# Altium PCB USB PROGRAMMER.PCBDOC
Units mil, origin at the board's own origin, x right, y up, seen from the top; angles counter-clockwise.
Board outline 975 x 2125 mil, 2 copper layers (Top Layer, Bottom Layer); 38 components, 37 nets, 124 pads, 0 vias.
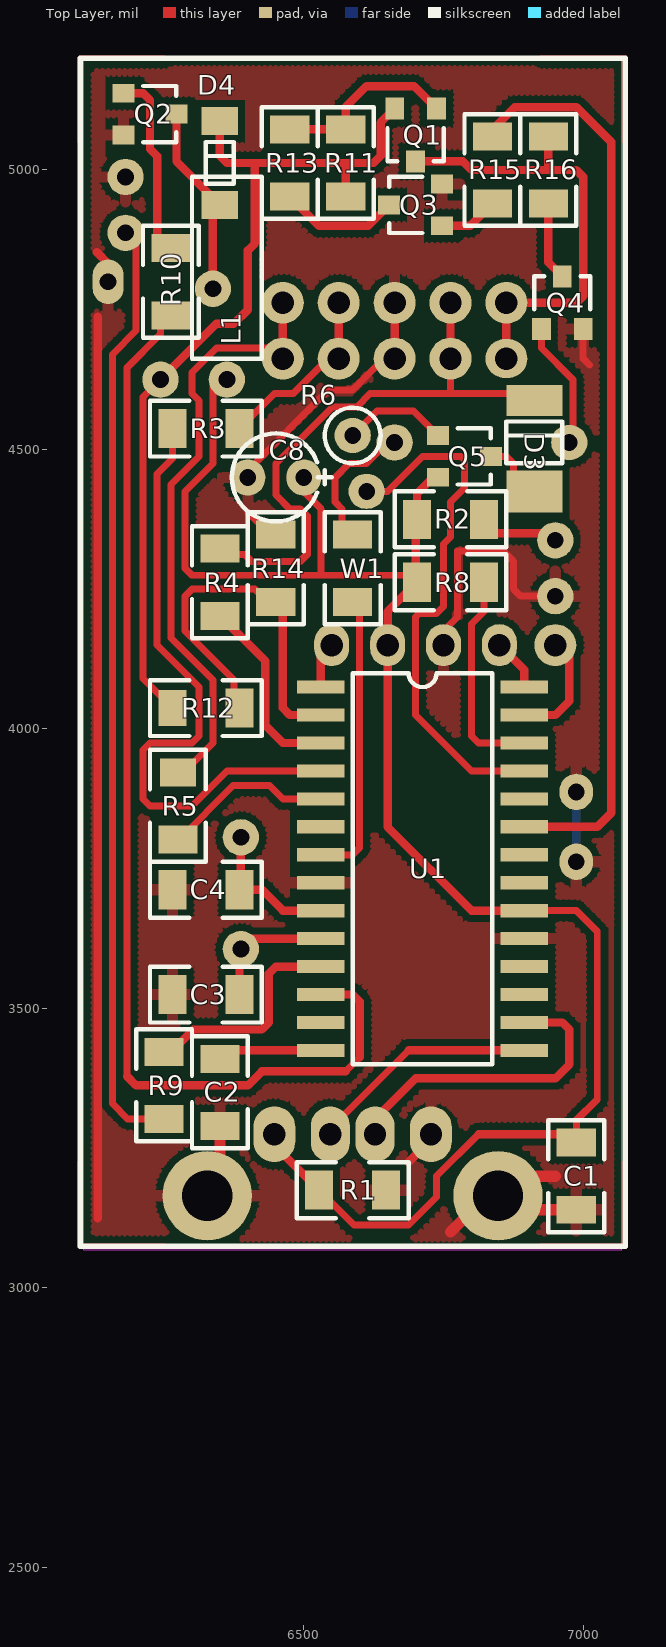
[diagram p0: Top Layer view]
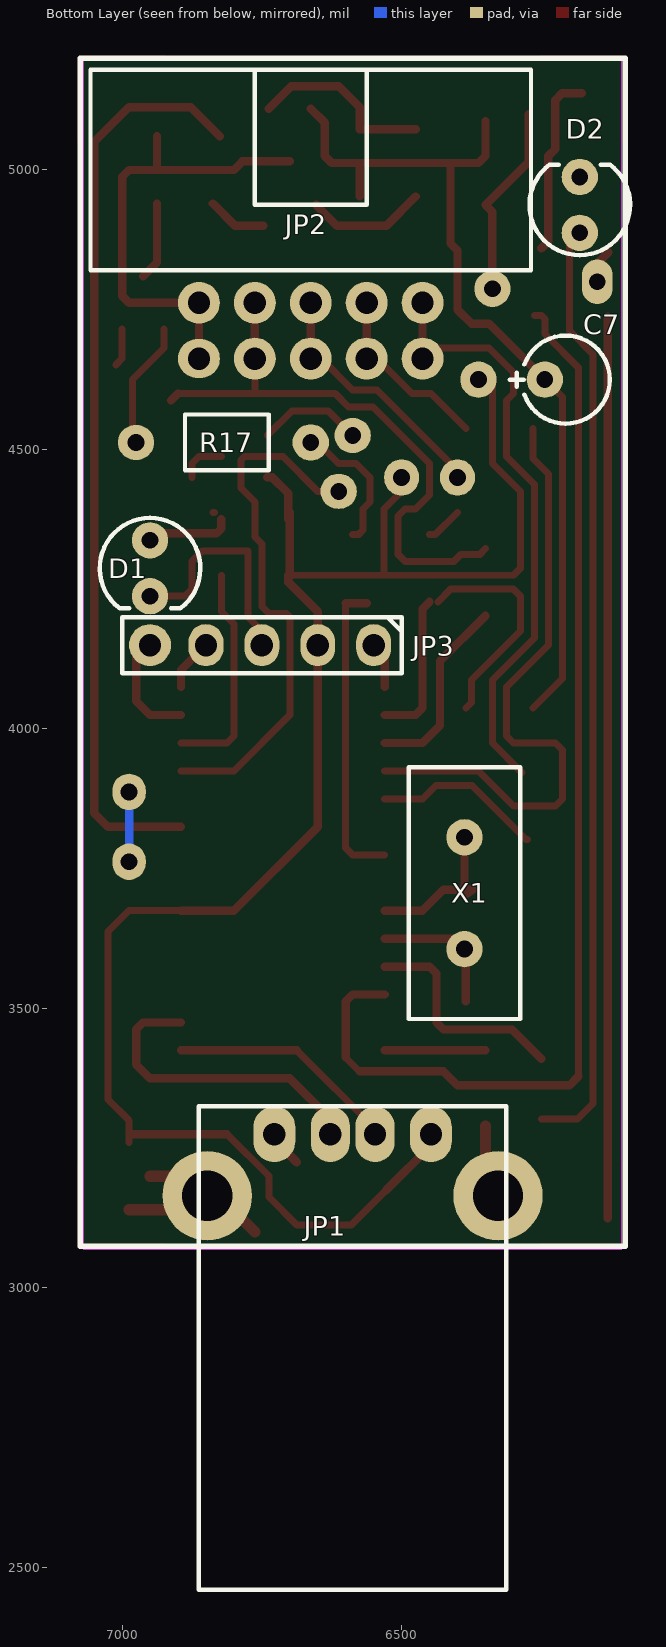
[diagram p1: Bottom Layer view, seen from below]

## Layer stack, top to bottom
Top Layer: signal copper 1.4
Dielectric: dielectric 12.6, FR-4, Dk 4.8
Bottom Layer: signal copper 1.4

## Board outline
6100,3075 7075,3075 7075,5200 6100,5200

## Design rules (kind name [scope] priority, off if disabled: settings)
Clearance [All] p1: gap=12.5
FabricationTestPointUsage TestPointUsage [All] p1: valid=0 allowmultiple=FALSE
FabricationTestpoint Testpoint [All] p1: side=3 testpointundercomponent=TRUE minsize=40 maxsize=100 preferedsize=60 minholesize=0 maxholesize=40 preferedholesize=32 testpointgrid=1 allowsidetop=TRUE allowsidebottom=TRUE usegrid=TRUE gridtolerance=0.01
PlaneConnect [All] p1: planeconnectstyle=Relief reliefexpansion=20 reliefentries=4 reliefconductorwidth=20 reliefairgap=10
PolygonConnect [All] p1: connectstyle=Relief reliefconductorwidth=20 reliefentries=4 polygonreliefangle="90 Angle"
RoutingVias [All] p1: holewidth=28 width=50 viastyle="Through Hole" minholewidth=28 minwidth=50 maxholewidth=28 maxwidth=50
SilkscreenOverComponentPads [All] p1: minsilkscreentomaskgap=10
SolderMaskExpansion [All] p1: expansion=4
Width [All] p1: maxlimit=20 minlimit=10 preferedwidth=20 bottomlayer_prefwidth=15 minimp=50.000000 maximp=50.000000 favimp=50.000000
24 further rules are at their usual default settings.

## Components (designator, comment, footprint, x,y, rotation, side; value= is the part's Value field where it differs from the comment)
C1 "Cap" 1206NP#1 6987.5,3200 r90 top
C2 "Cap" 1206NP#1 6350,3350 r90 top
C3 "Cap" 1206NP#1 6325,3525 r0 top
C4 "Cap" 1206NP#1 6325,3712.5 r180 top
C7 "Cap Pol" cap4mm#1 6206.25,4625 r180 bottom
C8 "Cap Pol" cap4mm#2 6450,4450 r180 top
D1 "LED" LED3MM 6950,4287.5 r270 bottom
D2 "LED" LED3MM 6181.25,4937.5 r90 bottom
D3 "SS34" D64 6912.5,4512.5 r270 top
D4 "1N4148" DSMD1MM 6350,5012.5 r270 top
JP1 "USB MALE" USB_A_MALE 6587.5,3275 r180 bottom
JP2 "Header5x1" IDC5x2_90 6662.5,4712.5 r180 bottom
JP3 "Header5x1" HDR5x1 6550,4150 r0 bottom
L1 "" RES400TH 6362.5,4825 r90 top
Q1 "BC857" SOT23 6700,5062.5 r180 top
Q2 "BC848" SOT23 6225,5100 r270 top
Q3 "BC848" SOT23 6700,4937.5 r90 top
Q4 "BC848" SOT23 6962.5,4762.5 r0 top
Q5 "BC857" SOT23 6787.5,4487.5 r270 top
R1 "Res" 1206NP#1 6587.5,3175 r0 top
R2 "Res" 1206NP#1 6762.5,4375 r180 top
R3 "Res" 1206NP#1 6325,4537.5 r0 top
R4 "Res" 1206NP#1 6350,4262.5 r90 top
R5 "Res" 1206NP#2 6275,3862.5 r90 top
R6 "Res" res250th_vertical 6587.5,4525 r270 top
R8 "Res" 1206NP#1 6762.5,4262.5 r180 top
R9 "Res" 1206NP#1 6250,3362.5 r90 top
R10 "Res" 1206NP#1 6262.5,4800 r270 top
R11 "Res" 1206NP#1 6575,5012.5 r270 top
R12 "Res" 1206NP#2 6325,4037.5 r180 top
R13 "Res" 1206NP#1 6475,5012.5 r90 top
R14 "Res" 1206NP#1 6450,4287.5 r270 top
R15 "Res" 1206NP#1 6837.5,5000 r90 top
R16 "Res" 1206NP#1 6937.5,5000 r90 top
R17 "Res" res250th 6812.5,4512.5 r180 bottom
U1 "" soic28 6712.5,3850 r270 top
W1 "CABLE" 1206NP#1 6587.5,4287.5 r90 top
X1 "XTAL" XTAL1 6387.5,3706.25 r90 bottom

## Footprints (in the part's own frame and the unit in brackets; to place one, negate y for a bottom-side part, rotate by r counter-clockwise, add the part's x,y. Pads: shape width x height; smd on the part's side, far side on the other; paste and mask are expansions set on the pad)
1206NP#1 [mil]
  rect 50x70 smd: 1(-60,0) 2(60,0)
  silkscreen extent -100,-50 100,50
1206NP#2 [mil]
  rect 50x70 smd: 1(-60,0)
  rect 50x65 smd: 2(60,0)
  silkscreen extent -100,-50 100,50
cap4mm#1 [mil] "CAPACITOR ELECTROLÍTICO"
  round 65 hole 30: 1(-37.5,0)
  oval 55x80 hole 30: 2(56.25,175)
  silkscreen extent -100,-79 79,79
cap4mm#2 [mil] "CAPACITOR ELECTROLÍTICO"
  oval 62.5x65 hole 30: 1(-50,0) 2(50,0)
  silkscreen extent -100,-79 79,79
D64 [mil]
  rect 75x100 smd: 1(87.5,0)
  rect 55x100 smd: 2(-75,0)
  silkscreen extent -38,-50 38,50
DSMD1MM [mil] "DIODO SMD"
  rect 50x65 smd: 1(75,0) 2(-75,0)
  silkscreen extent -38,-25 38,25
HDR5x1 [mil] "HEADER 5x1"
  oval 62.5x75 hole 40: 1(0,0) 2(100,0) 3(200,0) 4(300,0)
  round 75 hole 40: 5(400,0)
  silkscreen extent -50,-50 450,50
IDC5x2_90 [mil]
  oval 75x70 hole 40: 1(-200,-50)
  round 75 hole 40: 2(-200,50) 3(-100,-50) 4(-100,50) 5(0,-50) 6(0,50) 7(100,-50) 8(100,50) 9(200,-50) 10(200,50)
  silkscreen extent -394,108 394,467
LED3MM [mil] "LED 3MM"
  round 65 hole 30: 1(-50,0) 2(50,0)
  silkscreen extent -90,-90 72,90
res250th [mil] "RESISTENCIA THROUGH-HOLE"
  oval 65x62.5 hole 30: 1(-162.5,0)
  round 65 hole 30: 2(150,0)
  silkscreen extent -75,-50 75,50
res250th_vertical [mil]
  oval 62.5x65 hole 30: 1(0,0) 2(100,25)
  silkscreen extent -50,-50 50,50
RES400TH [mil]
  round 65 hole 30: 1(-200,0) 2(-37.5,25)
  silkscreen extent -162,-63 162,63
soic28 [mm]
  rect 0.6x2.15 smd: 1(-5.715,-4.625) 2(-4.445,-4.625) 3(-3.175,-4.625) 4(-1.905,-4.625) 5(-0.635,-4.625) 6(0.635,-4.625) 7(1.905,-4.625) 8(3.175,-4.625) 9(4.445,-4.625) 10(5.715,-4.625) 11(6.985,-4.625) 12(8.255,-4.625) 13(9.525,-4.625) 14(10.795,-4.625) 15(10.795,4.625) 16(9.525,4.625) 17(8.255,4.625) 18(6.985,4.625) 19(5.715,4.625) 20(4.445,4.625) 21(3.175,4.625) 22(1.905,4.625) 23(0.635,4.625) 24(-0.635,4.625) 25(-1.905,4.625) 26(-3.175,4.625) 27(-4.445,4.625) 28(-5.715,4.625)
  silkscreen extent -6.35,-3.18 11.43,3.18
SOT23 [mm] "SOT23"
  rect 0.85x1 smd: 1(-0.95,-1.2) 2(0.95,-1.2) 3(0,1.2)
  silkscreen extent -1.27,-0.3 1.28,1.2
USB_A_MALE [mil]
  oval 75x100 hole 40: 1(140,0) 4(-140,0)
  oval 70x100 hole 40: 2(40,0) 3(-40,0)
  round 160 hole 90: 5(260,-110) 6(-260,-110)
  silkscreen extent -275,-815 275,50
XTAL1 [mil] "CRISTAL DE CUARZO"
  round 65 hole 30: 1(-100,0) 2(100,0)
  silkscreen extent -225,-100 225,100

## Part data
C1 C2 C3 C4: "Capacitor"
C7 C8: "Capacitor Polarizado"
D1 D2: "Led"
D3: library part 1N4148, "High Conductance Fast Diode"
D4: "High Conductance Fast Diode"
JP1: library part USB, "USB Connector"
JP2: "Header 5x1"
JP3: library part Header6x1, "Header 6x1"
L1: library part Inductor, "Inductor"
Q1 Q5: library part BC856A, "100mA 65V PNP Bipolar Transistor"
Q2 Q3 Q4: library part BC846A, "100mA 65V NPN Bipolar Transistor"
R1 R2 R3 R4 R5 R6 R8 R9 R10 R11 R12 R13 R14 R15 R16 R17: "Resistor"
U1: library part PIC18F2550, "Enhanced FLASH Microcontroller"
W1: "Cable"
X1: "Crystal Oscillator"

## Free pads (board coordinates)
  oval 60x65 hole 30: 2(6987.5,3887.5) 3(6987.5,3762.5)

## Nets (pads, with @x,y where several pads share a name; then routed paths per layer and width w, separated by ;. In a path a pad name is that pad's centre, name@x,y a point inside that pad or via, vN(x,y) a via of type N, cw(c..) or ccw(c..) an arc to the next point about the centre after c; other vN are vias at no path point)
BSY: R9.2 U1.11 | length 400
  Top Layer w15: R9.2@6250,3410 6302.5,3462.5 6425,3462.5 6437.5,3475 6437.5,3562.5 6450,3575 U1.11
D+: JP1.3 U1.16 | length 563.5
  Top Layer w15: JP1.3 6627.5,3302.5 6700,3375 6950,3375 6975,3400 6975,3462.5 6962.5,3475 U1.16
D-: JP1.2 U1.15 | length 415.1
  Top Layer w12.5: JP1.2@6547.5,3285 6687.5,3425
  Top Layer w15: JP1.2 JP1.2@6547.5,3285 ; 6687.5,3425 U1.15
GND: C1.1 C2.1 C3.1 C4.2 C7.2 C8.2 D1.2 D2.2 JP1.4 JP1.5 JP1.6 JP2.5 JP2.6 JP3.3 pad.2 pad.3 Q2.2 Q3.2 Q4.2 R1.2 R14.1 U1.8 U1.19 | length 3233.4
  Top Layer w12.5: 6400,4387.5 6440,4347.5 R14.1 ; C8.2 6400,4462.5 6543.75,4606.25 6587.5,4606.25 6643.75,4662.5 JP2.5 ; JP3.3 6750,4175 6775,4200 6775,4318.75 6856.25,4318.75 6875,4300 6875,4250 6887.5,4237.5 D1.2 ; Q4.2 6999.9,4662.6 7011.25,4651.25
  Top Layer w15: 6130,4852.81 6150,4832.81 C7.2 ; 6131.25,3125 6131.25,4737.5 ; JP2.5 JP2.6 ; 6687.5,3225 6727.5,3265 JP1.4
  Top Layer w20: JP1.5@6350,3175 C2.1 ; 6762.5,3100 JP1.6@6821.25,3158.75 ; JP1.6@6877.5,3140 C1.1 ; JP1.6@6900,3200 6950,3200
  Bottom Layer w15: pad.3 pad.2
ICSPCLK: R5.1 U1.5 | length 305.1
  Top Layer w12.5: R5.1 6277.5,3802.5 6373.75,3898.75 6438.75,3898.75 6462.5,3875 U1.5
ICSPDAT: R3.1 U1.4 | length 1139.3
  Top Layer w12.5: R3.1 6265,4483.75 6237.5,4456.25 6237.5,4150 6312.5,4075 6312.5,3987.5 6300,3975 6225,3975 6212.5,3962.5 6212.5,3875 6225,3862.5 6300,3862.5 6362.5,3925 U1.4
MCLR: JP3.1 U1.1 | length 83.1
  Top Layer w15: U1.1 6530.41,4130.41 JP3.1
MCLRTGT: R17.2 W1.2 | length 258.6
  Top Layer w12.5: W1.2 6577.5,4347.5 6568.75,4356.25 6568.75,4393.75 6556.25,4406.25 6556.25,4450 6581.25,4475 6612.5,4475 R17.2@6662.5,4525
NetC2_2: C2.2 U1.14 | length 180.4
  Top Layer w15: C2.2@6350,3425 U1.14
NetC3_2: C3.2 U1.10 X1.1 | length 227.9
  Top Layer w15: C3.2@6385,3512.5 X1.1@6385,3610 ; X1.1@6400,3625 U1.10
NetC4_1: C4.1 U1.9 X1.2 | length 301.5
  Top Layer w15: X1.2@6387.5,3812.5 6387.5,3702.5 6372.5,3712.5 6425,3712.5 6462.5,3675 U1.9
NetC7_1: C7.1 D4.2 Q1.2 R11.2 R12.2 | length 1613.4
  Top Layer w12.5: C7.1 6212.5,4593.75 6212.5,4090 R12.2
  Top Layer w15: C7.1 6343.75,4725 6375,4725 6400,4750 6400,4856.25 6412.5,4868.75 6412.5,5012.5 ; D4.2 6350,5025 6362.5,5012.5 6625,5012.5 6637.5,5025 6637.5,5084.65 Q1.2 ; R11.2 6575,5012.5
NetD1_1: D1.1 R2.1 | length 178
  Top Layer w12.5: R2.1@6835,4387.5 R2.1@6837.5,4387.5 ; D1.1@6933.75,4353.75 D1.1
  Top Layer w15: R2.1 6822.5,4358.75 6831.25,4350 6937.5,4350 D1.1
NetD2_1: D2.1 R9.1 | length 1686.8
  Top Layer w12.5: D2.1 6200,4868.75 6200,4712.5 6157.5,4670 6157.5,3330 6185,3302.5 R9.1
NetD3_1: D3.1 Q5.3 | length 82.9
  Top Layer w12.5: Q5.3@6822.24,4487.5 6862.5,4487.5 6875,4475 D3.1@6875,4450
NetD4_1: D4.1 L1.2 Q2.3 | length 349.9
  Top Layer w15: Q2.3 6272.24,5015.26 D4.1 6337.5,4925 L1.2
NetQ1_2: Q1.1 R11.1 R13.2 | length 334.6
  Top Layer w15: R13.2 R11.1 6575,5112.5 6612.5,5150 6697.15,5150 Q1.1
NetQ2_2: Q2.1 R10.1 | length 327.7
  Top Layer w15: Q2.1 6212.6,5137.4 6225,5125 6225,5037.5 6237.6,5024.9 6237.6,4872.4 R10.1@6250,4860
NetQ3_1: Q3.3 R13.1 | length 215
  Top Layer w15: R13.1 6527.5,4900 6615.26,4900 Q3.3
NetQ3_2: Q3.1 R15.1 | length 106.8
  Top Layer w15: Q3.1 6797.6,4900.1 R15.1
NetQ4_1: Q4.3 R16.1 | length 140.6
  Top Layer w15: R16.1 6937.5,4834.74 Q4.3
NetQ4_2: Q4.1 R17.1 | length 222.6
  Top Layer w12.5: Q4.1@6925.1,4712.4 Q4.1 6925.1,4681.15 6981.25,4625 R17.1@6981.25,4518.75
NetQ5_2: Q5.1 R6.1 | length 217.6
  Top Layer w12.5: R6.1@6587.5,4500 6581.25,4518.75 6631.25,4568.75 6696.41,4568.75 Q5.1
NetU1_7: U1.7 W1.1 | length 549.8
  Top Layer w12.5: U1.7 6587.5,3775 6600,3787.5 W1.1@6600,4225
  Top Layer w15: W1.1@6562.5,4225 W1.1@6600,4225
PGC: JP3.5 U1.27 | length 208.4
  Top Layer w15: U1.27 6950,4025 6975,4050 6975,4137.5 6962.5,4150 JP3.5
PGD: JP3.4 U1.28 | length 93.5
  Top Layer w15: JP3.4 6894.59,4105.41 U1.28
SW: R8.1 U1.26 | length 396.6
  Top Layer w12.5: R8.1@6822.5,4275 6822.5,4210 6800,4187.5 6800,3987.5 6812.5,3975 U1.26
VCC: C1.2 C8.1 JP1.1 JP3.2 L1.1 Q5.2 R1.1 R2.2 R8.2 U1.20 | length 3211.9
  Top Layer w12.5: L1.1@6337.5,4625 6337.5,4475 6287.5,4425 6287.5,4287.5 6300,4275 R8.2@6700,4275 ; C8.1@6475,4450 6531.25,4393.75 6531.25,4275 ; R1.1 6590,3112.5 6687.5,3112.5 6737.5,3162.5 6737.5,3200 6812.5,3275 ; R8.2@6700,4272.5 R8.2@6702.5,4275 ; U1.20 6987.5,3675 7025,3637.5 7025,3337.5 6987.5,3300 C1.2
  Top Layer w15: JP1.1 6447.5,3255 R1.1 ; R8.2@6700,4272.5 R2.2@6700,4387.5 ; R8.2@6702.5,4275 R8.2 6650,4210 6650,3825 6800,3675 U1.20 ; R2.2 6702.5,4421.25 6731.35,4450.1 Q5.2 ; 6812.5,3275 C1.2@6985,3275
VDDTGT: D3.2 JP2.3 JP2.4 R4.2 | length 1043.2
  Top Layer w12.5: R4.2 6360,4312.5 6393.75,4312.5 6406.25,4300 6493.75,4300 6506.25,4312.5 6506.25,4381.25 6493.75,4393.75 6475,4393.75 6450,4418.75 6450,4475 6551.25,4576.25 6595,4576.25 6618.75,4600 D3.2@6900,4600 ; 6762.5,4606.25 JP2.3
  Top Layer w15: JP2.3 JP2.4 ; D3.2@6900,4600 D3.2
VDDTGTFB: R4.1 U1.3 | length 342
  Top Layer w15: R4.1 6431.25,4121.25 6431.25,4006.25 6462.5,3975 U1.3
VDDTGTP: R6.2 U1.25 | length 950.3
  Top Layer w12.5: R6.2 6650,4425 6712.5,4487.5 6781.25,4487.5 6787.5,4481.25 6787.5,4431.25 6762.5,4406.25 6762.5,4343.75 6750,4331.25 6750,4218.75 6737.5,4206.25 6706.25,4206.25 6700,4200 6700,4025 6800,3925 U1.25
VPPFB: R12.1 R14.2 U1.2 | length 670.7
  Top Layer w12.5: R12.1 6375,4047.5 6375,4087.5 6287.5,4175 6287.5,4237.5 6300,4250 6412.5,4250 R14.2@6435,4227.5
  Top Layer w15: R14.2 6462.5,4215 6462.5,4037.5 6475,4025 U1.2
VPPON: R15.2 U1.23 | length 1638.4
  Top Layer w15: R15.2@6825,5060 6877.5,5112.5 6987.5,5112.5 7050,5050 7050,3850 7025,3825 U1.23
VPPPUMP: R10.2 U1.12 | length 2019.6
  Top Layer w12.5: 6183.75,3378.75 6183.75,4646.25 6243.75,4706.25 6243.75,4733.75 6250,4740 R10.2 ; 6575,3387.5 6600,3412.5
  Top Layer w15: 6183.75,3378.75 6200,3362.5 6400,3362.5 6425,3387.5 6575,3387.5 ; U1.12 6587.5,3525 6600,3512.5 6600,3412.5
XICSPCLK: JP2.9 JP2.10 R5.2 | length 1051.9
  Top Layer w12.5: R5.2@6285,3922.5 6337.5,3975 6337.5,4087.5 6262.5,4162.5 6262.5,4437.5 6312.5,4487.5 6312.5,4587.5 6300,4600 6300,4637.5 6343.75,4681.25 6456.25,4681.25 JP2.9@6462.5,4687.5
  Top Layer w15: JP2.9@6462.5,4687.5 JP2.10
XICSPDAT: JP2.7 JP2.8 R3.2 | length 329.3
  Top Layer w12.5: R3.2 6447.5,4600 6481.25,4600 6543.75,4662.5 JP2.7
  Top Layer w15: JP2.7 JP2.8
XVPP: JP2.1 JP2.2 Q1.3 R16.2 | length 826.7
  Top Layer w15: Q1.3 6784.74,5015.26 6800,5000 6987.5,5000 7000,4987.5 7000,4775 6987.5,4762.5 JP2.2 JP2.1 ; 6937.5,5000 R16.2
pads on no net: U1.6 U1.13 U1.17 U1.18 U1.21 U1.22 U1.24
copper on no net: | length 1200
  Top Layer w10: 6100,3225 6100,3075 6250,3075 ; 6100,5050 6100,5200 6250,5200 ; 6925,3075 7075,3075 7075,3225 ; 6925,5200 7075,5200 7075,5050

## Polygon pours and split planes (outlines as drawn)
GND on Top Layer "Top Layer-GND" (hatched 90Degree grid 10 track 10, remove dead copper, pour order 2): 7062.5,5187.5 6112.5,5187.5 6112.5,3050 7062.5,3050

## Keep-outs
Keep-Out Layer:
  lines w0: 6106.25,3068.75 6106.25,5200 7068.75,5200 7068.75,3068.75 6106.25,3068.75

## Silkscreen, mask and mechanical layers (free items; w line width, h text height)
Top Overlay:
  the board outline again, w10
Bottom Overlay:
  the board outline again, w10

## Dimensions
6100,3075 to 7075,3075 on Top Overlay
6100,3075 to 6100,5200 on Top Overlay